# Altium PCB JacdacBrainESP32 48.PcbDoc (part 3 of 3)
Units mm, origin at the board's own origin, x right, y up, seen from the top; angles counter-clockwise.
Board outline 34 x 42.68 mm, 2 copper layers (Top Layer, Bottom Layer), stack 1.525 mm thick; 80 components, 57 nets, 295 pads, 72 vias.
Unrouted connection lines stored in the file: 49.
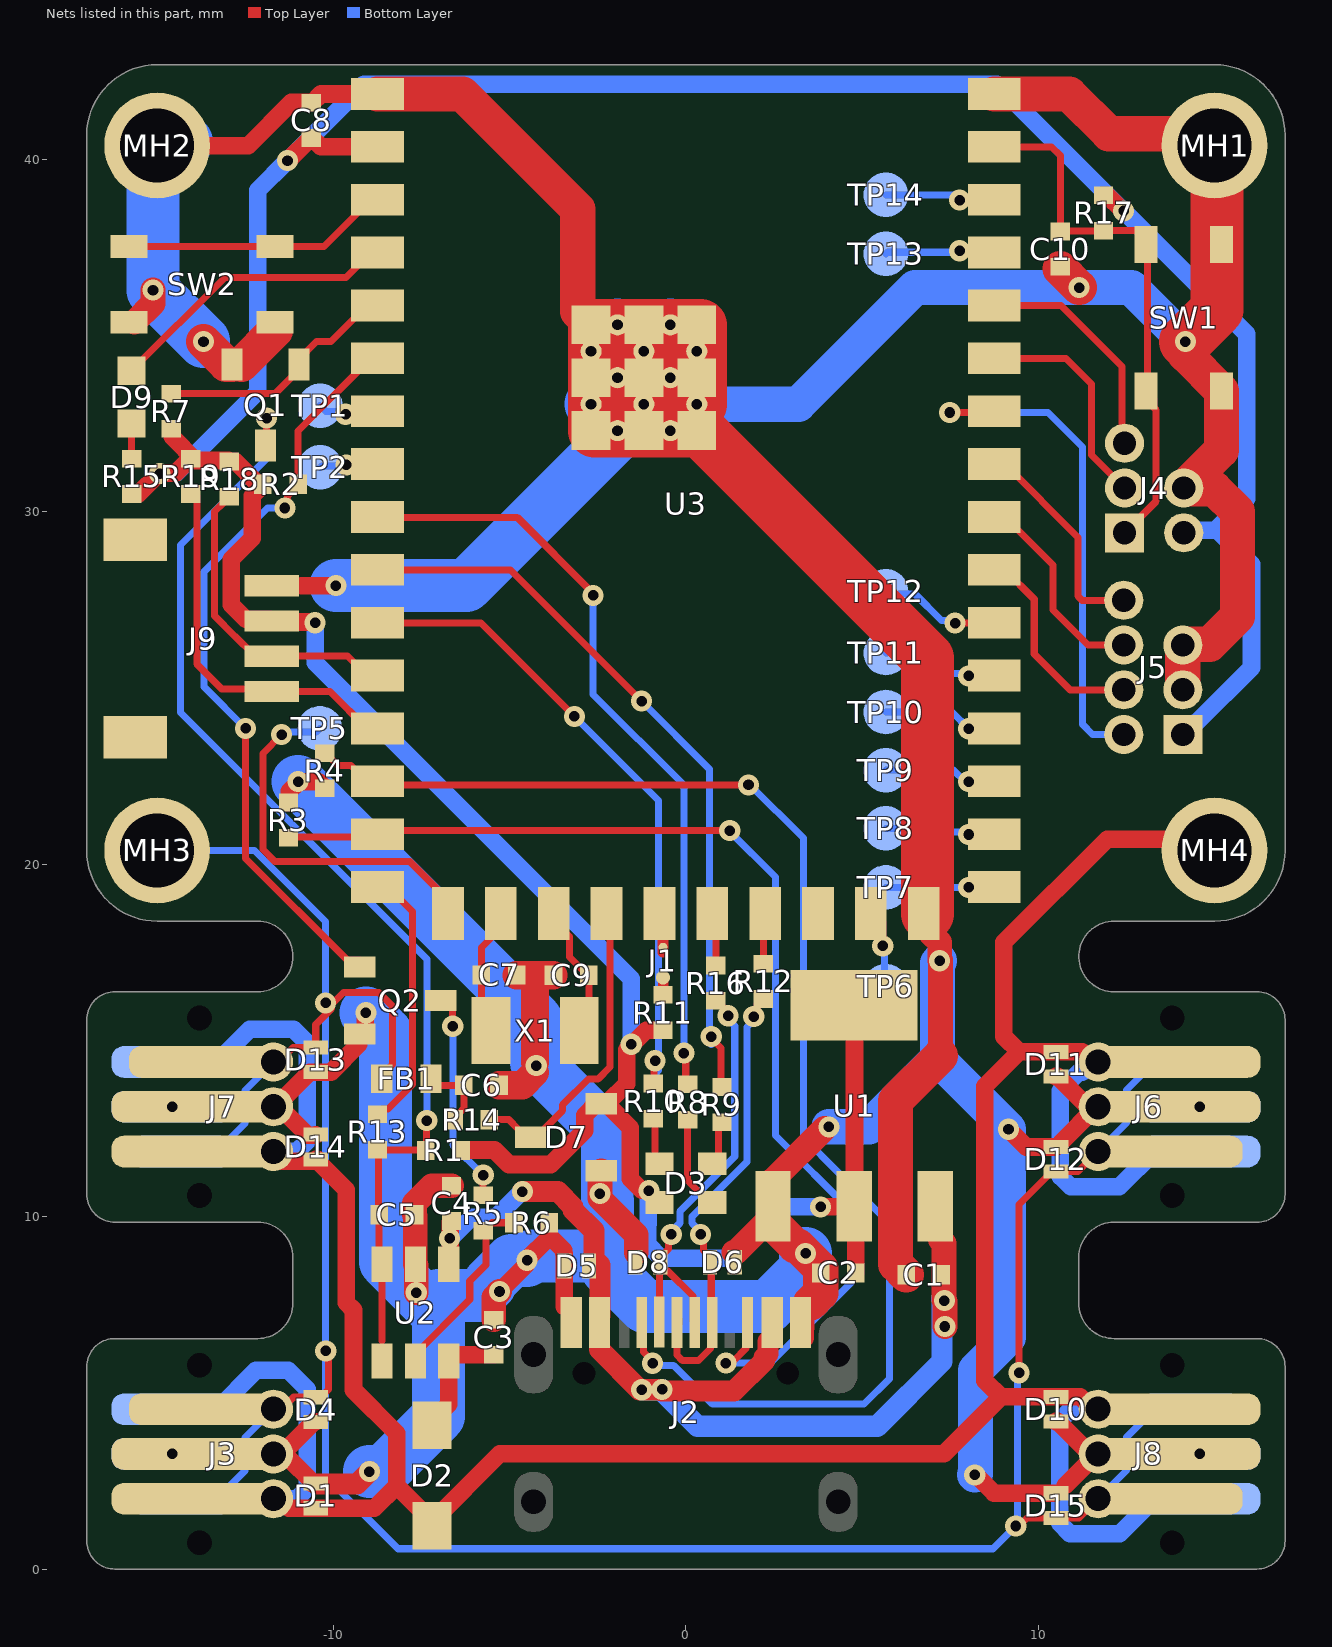
[diagram p2: the nets of this part, all layers, seen from the top]

## Via types
v1: diameter 0.6, hole 0.3, Top Layer to Bottom Layer, tented both sides, 72 vias

## Nets (pads, with @x,y where several pads share a name; then routed paths per layer and width w, separated by ;. In a path a pad name is that pad's centre, name@x,y a point inside that pad or via, vN(x,y) a via of type N, cw(c..) or ccw(c..) an arc to the next point about the centre after c; other vN are vias at no path point)
3V3: C2.2 C8.2 D3.1 D7.2 J4.2 J5.1 J9.2 R1.1 R2.1 R7.1 R11.1 R15.2 R17.1 R18.1 R19.1 U1.2 U3.2 | length 114.3
  Top Layer w0.3: R15.2@-15.725,30.5 R15.2@-15.7,30.5
  Top Layer w0.5: R15.2@-15.7,30.5 -15.533,30.5 -14.955,31.078 v1(-14.928,31.078) -14.909,31.097 -14.478,31.097 -14.075,31.5 R19.1@-14.025,31.5 ; R7.1@-14.6,32.35 -14.575,32.35 -14.575,32.125 R19.1@-13.9,31.45 ; R19.1@-13.875,31.45 R18.1@-12.975,31.45 ; R18.1@-12.943,31.425 -12.78,31.425 -12.155,30.8 -12,30.8 R2.1@-12,30.775 ; R2.1@-12,30.75 -12.3,30.45 -12.3,29.247 -12.9,28.647 -12.9,27.361 -12.489,26.95 -11.8,26.95 -11.719,26.869 -10.538,26.869 v1(-10.519,26.85) ; v1(-11.303,39.962) -11.288,39.962 -10.65,40.6 C8.2@-10.625,40.6 -10.6,40.6 -10.35,40.35 U3.2@-8.75,40.35 ; R1.1@-6.375,11.89 -5.43,11.89 -5.018,11.478 -3.837,11.478 -2.871,12.444 -2.871,12.879 -2.55,13.2 D7.2@-2.4,13.2 -2.35,13.25 -2.2,13.25 -1.678,13.772 -1.678,14.734 -1.55,14.862 v1(-1.55,14.89) -1.523,14.89 -1.123,15.29 R11.1@-0.674,15.29 ; D7.2@-2.25,13.2 -1.575,12.525 -1.575,11.07 -1.256,10.75 -1.069,10.75 v1(-1.05,10.731) ; v1(3.824,10.276) 4.535,10.276 4.561,10.302 4.561,10.326 U1.2@4.785,10.55 ; U1.2@4.785,16.25 U1.2@4.785,10.55 ; C2.2@4.825,8.4 4.825,8.858 4.82,8.863 4.82,10.515 U1.2@4.785,10.55 ; R17.1@11.825,38.975 R17.1@11.85,38.975 11.949,38.975 12.391,38.533 v1(12.418,38.533)
  Bottom Layer w0.5: v1(-14.928,31.078) -14.911,31.095 -14.46,31.095 -12.149,33.406 -12.149,39.116 v1(-11.303,39.962) ; v1@-11.296,39.962 -9.133,42.125 8.826,42.125 15.909,35.042 15.909,30.365 15.05,29.506 16.047,28.509 16.047,25.577 14.485,24.015 14.44,24.015 J5.1@14.1,23.675 ; v1(-10.519,26.85) -10.519,25.716 -1.55,16.747 v1(-1.55,14.89) ; v1@-1.069,10.704 -1.069,9.794 -1.089,9.775 -1.089,9.215 -0.693,8.82 1.215,8.82 2.671,10.276 v1(3.824,10.276) ; J4.2@14.125,29.4 14.193,29.468 15.088,29.468
\I\L\I\M\_\C\T\R\L\: Q2.1 R2.2 U3.6 | length 22
  Top Layer w0.2: v1(-12.489,23.85) -12.489,20.16 -9.607,17.278 -9.252,17.278 Q2.1@-9.077,17.103 ; v1(-11.375,30.104) -11.298,30.18 -11.298,30.452 -11,30.75 -11,32.289 -8.949,34.34 -8.649,34.34 U3.6@-8.554,34.246
  Bottom Layer w0.2: v1(-12.489,23.85) -13.666,25.026 -13.666,28.304 -11.866,30.104 v1(-11.375,30.104)
\I\L\I\M\_\E\N\A\B\L\E\: Q1.1 R7.2 U3.5 | length 7.2
  Top Layer w0.2: R7.2@-14.6,33.35 -11.65,33.35 -10.975,34.025 -10.975,34.325 -10.476,34.824 -10.067,34.824 -9.4,35.491 -9.4,35.5 -9.06,35.84 U3.5@-8.649,35.84
\I\L\I\M\_\F\A\U\L\T\: R13.1 U3.16 | length 7.4
  Top Layer w0.2: R13.1@-8.75,12.9 -8.6,13.05 -8.453,13.05 -7.752,13.751 -7.752,18.652 -8.44,19.34 U3.16@-8.649,19.34
CC1: J2.A5 R4.1 U3.14 | length 39.2
  Top Layer w0.2: R4.1@-10.125,23.05 -9.874,22.799 -9.499,22.799 -9.04,22.34 -8.649,22.34 -8.558,22.249 v1(1.777,22.249) ; J2.A5@-1.25,6.68 -1.2,6.63 -1.2,6.158 -0.944,5.902 v1(-0.944,5.841)
  Bottom Layer w0.2: v1(-0.944,5.841) -0.877,5.774 -0.344,5.774 0.75,4.68 5.059,4.68 5.778,5.399 5.778,9.802 4.339,11.241 3.335,12.246 3.335,20.738 1.823,22.249 v1(1.777,22.249)
CC2: J2.B5 R3.1 U3.15 | length 32.6
  Top Layer w0.2: R3.1@-11.175,20.775 -8.815,20.775 -8.75,20.84 -8.649,20.84 -8.536,20.952 v1(1.246,20.952) ; v1(1.136,5.842) 1.213,5.919 1.362,5.919 1.7,6.257 J2.B5@1.7,6.859
  Bottom Layer w0.2: v1(1.136,5.842) 2.399,5.842 4.705,8.148 4.705,10.138 2.541,12.302 2.541,19.635 1.246,20.929 v1(1.246,20.952)
ESP_EN: C10.2 J4.1 R17.2 SW1.3 SW1.4 U3.41 | length 15.9
  Top Layer w0.2: U3.41@8.75,40.35 10.376,40.35 10.625,40.101 C10.2@10.625,37.95 10.638,37.962 11.837,37.962 R17.2@11.85,37.975 12.825,37.975 13.05,37.75 SW1.3@13.05,37.575 ; J4.1@12.449,29.4 13.345,30.296 13.345,32.883 13.275,32.953 13.275,33.2 SW1.4@13.05,33.425 ; SW1.4@12.925,33.85 12.925,33.65 13.096,33.479 SW1.3@13.096,37.575
ESP_RXD: J4.5 U3.38 | length 6.6
  Top Layer w0.2: U3.38@8.75,35.85 10.642,35.85 12.375,34.117 12.375,32.014 J4.5@12.449,31.94
ESP_TCK: J5.4 U3.33 | length 6
  Top Layer w0.2: U3.33@8.75,28.35 9.05,28.35 9.885,27.515 9.885,25.965 10.905,24.945 J5.4@12.424,24.945
ESP_TDI: J5.8 U3.35 | length 6.3
  Top Layer w0.2: U3.35@8.75,31.35 9.05,31.35 11.129,29.271 11.129,27.601 11.246,27.484 J5.8@12.424,27.485
ESP_TDO: J5.6 U3.34 | length 5.9
  Top Layer w0.2: U3.34@8.75,29.85 9.05,29.85 10.414,28.486 10.414,27.215 11.414,26.215 J5.6@12.424,26.215
ESP_TMS: J5.2 U3.36 | length 14.7
  Top Layer w0.2: v1(7.489,32.814) 8.696,32.814 U3.36@8.786,32.905
  Bottom Layer w0.2: v1(7.489,32.814) 10.276,32.814 11.25,31.84 11.25,23.967 11.543,23.675 J5.2@12.424,23.675
ESP_TXD: J4.3 U3.37 | length 6.4
  Top Layer w0.2: U3.37@8.75,34.35 10.783,34.35 11.509,33.624 11.509,31.61 J4.3@12.449,30.67
GND: C1.1 C2.1 C3.1 C4.1 C5.1 C6.1 C7.1 C8.1 C9.1 C10.1 D1.2 D4.2 D5.2 D6.2 D7.1 D8.2 D10.2 D11.2 D12.2 D13.2 D14.2 D15.2 J2.A1 J2.A12 J2.B1 J2.B12 J3.2 J4.4 J5.3 J5.5 J6.2 J7.2 J8.2 J9.1 MH1.1 MH2.1 Q1.2 Q2.2 R3.2 R4.2 R6.1 SW1.1 SW1.2 SW2.1 SW2.2 U1.1 U2.2 U3.1 U3.26 U3.42 U3.43 | length 243.4
  Top Layer w0.5: MH2.1@-15,40.387 -12.413,40.387 -11.192,41.608 C8.1@-10.625,41.608 ; J7.2@-11.7,13.116 J7.2@-11.655,13.116 ; R3.2@-11.275,21.75 -11.25,21.75 -11.25,22.063 -11,22.313 v1(-11,22.34) -10.997,22.337 -10.412,22.337 R4.2@-10.238,22.163 ; -10.9,27.9 v1(-9.93,27.9) ; C8.1@-10.625,41.6 -10.6,41.6 -10.35,41.85 U3.1@-8.75,41.85 ; D1.2@-10.5,2.425 -10.509,2.416 -10.599,2.416 -10.599,2.474 -11.273,3.148 -11.583,3.148 J3.2@-11.7,3.265 -11.583,3.382 -11.343,3.382 -10.55,4.175 D4.2@-10.5,4.175 ; D14.2@-10.5,12.325 -10.519,12.306 -10.725,12.306 -11.535,13.116 J7.2@-11.655,13.116 ; Q2.2@-9.277,14.89 -10.067,14.1 D13.2@-10.5,14.1 -10.504,14.096 -10.674,14.096 J7.2@-11.655,13.116 ; Q2.2@-9.252,15.178 -9.146,15.178 -9.096,15.228 -9.096,15.764 v1(-9.077,15.783) ; C3.1@-5.45,7.075 C3.1@-5.425,7.075 ; v1@-5.274,7.908 -5.254,7.908 -4.525,8.637 -4.525,8.74 v1(-4.505,8.759) -4.505,8.786 -3.875,9.416 ; R6.1@-3.875,9.825 -3.875,9.456 -3.46,9.041 -3.46,8.958 -3.45,8.948 -3.45,8.604 -3.446,8.6 J2.A1@-3.446,7.448 ; J2.A12@3.3,6.737 3.383,6.82 J2.A12@3.383,6.555 ; J2.A12@3.4,6.837 J2.A12@3.4,7 ; v1(8.196,2.672) 8.223,2.672 8.745,2.15 D15.2@10.5,2.15 ; v1(9.154,12.479) 9.658,11.975 D12.2@10.5,11.975 ; D10.2@10.5,4.185 10.55,4.185 11.353,3.382 11.583,3.382 J8.2@11.7,3.265 11.655,3.265 10.77,2.38 ; D11.2@10.5,13.975 10.55,13.975 11.292,13.233 J6.2@11.583,13.233 ; D12.2@10.65,12.114 J6.2@11.652,13.116
  Top Layer w0.6: D1.2@-10.45,2.412 -9.332,2.412 v1(-8.98,2.764)
  Top Layer w0.7: SW2.2@-15.65,35.375 -15.119,35.906 v1(-15.119,36.287) ; C5.1@-7.7,10.05 -7.7,10.383 -7.208,10.875 C4.1@-6.649,10.875 ; U2.2@-7.675,8.65 C5.1@-7.676,10.026 ; v1@-7.646,7.847 U2.2@-7.646,8.621 ; C3.1@-5.45,7.075 -5.45,7.711 v1(-5.286,7.875) ; D7.1@-2.4,11.3 -2.438,11.262 v1(-2.438,10.652) -2.438,10.522 -1.403,9.487 D8.2@-1.403,8.979 ; D6.2@1.362,8.988 1.423,8.988 2.485,10.05 2.485,11.05 v1@3.935,12.5 ; U3.26@6.851,18.59 6.951,18.49 6.951,18.029 7.2,17.78 v1(7.2,17.257) ; 7.224,14.562 v1@7.224,17.282
  Top Layer w0.8: C6.1@-5.3,13.725 -4.637,13.725 v1@-4.277,14.085 ; C7.1@-4.8,16.854 -4.8,16.845 -4.277,16.845 ; v1@-4.277,14.372 -4.277,16.845 ; C9.1@-3.754,16.845 -4.277,16.845
  Top Layer w1: v1(-13.686,34.824) -13.036,34.175 Q1.2@-12.875,34.175 ; Q1.2@-12.609,34.175 SW2.1@-11.65,35.134 ; U3.1@-8.75,41.85 -6.338,41.85 -3.07,38.582 -3.07,35.68 -2.74,35.35 U3.43@-2.74,35.3 ; U3.43@-2.69,34.55 U3.43@-2.69,35.3 ; U1.1@2.475,10.05 2.475,9.8 3.107,9.168 ; v1@3.184,9.168 3.825,8.528 3.825,7.834 J2.A12@3.546,7.554 ; C1.1@6.25,8.35 5.95,8.65 5.95,13.287 7.224,14.562 ; U3.42@8.75,41.85 10.875,41.85 12,40.725 14.662,40.725 MH1.1@15,40.387 ; C10.1@10.625,36.892 v1(11.158,36.359) ; J5.3@14.1,24.945 J5.5@14.1,26.215 14.121,26.236 14.861,26.236 15.65,27.025 15.65,30 15.001,30.649 14.146,30.649 J4.4@14.125,30.67 15.2,31.745 SW1.2@15.2,33.425 14.171,34.454 v1(14.171,34.824)
  Top Layer w1.5: U3.43@-2.589,32.29 U3.43@-1.089,32.29 ; U3.43@-2.589,32.448 -2.589,35.29 U3.43@-1.089,35.29 ; U3.43@0.411,33.04 0.411,34.54 0.42,34.54 0.411,34.549 0.411,35.29 U3.43@-1.089,35.29 ; U3.26@6.851,18.59 6.851,25.85 0.411,32.29 U3.43@-1.089,32.29 ; v1(14.171,34.824) 15.075,35.728 15.075,38 15.075,40.312 MH1.1@15,40.387 ; U3.43@-1.089,32.29 U3.43@-1.089,35.29
  Bottom Layer w0.5: MH2.1@-14.17,40.487 MH2.1@-14.17,41.046 ; v1@-13.686,34.841 -13.686,35.3 ; -13.686,35.3 -13.66,35.3 -13.679,35.319 -14.072,35.319 -14.053,35.3 -13.686,35.3
  Bottom Layer w1: U3.43@-2.69,34.55 U3.43@-1.94,33.8 ; U3.43@0.31,33.05 3.193,33.05 6.502,36.359 12.637,36.359 v1(14.171,34.824) ; v1(4.06,12.546) 5.198,12.546 7.142,14.491 ; v1(7.2,17.257) 7.137,17.195 7.137,14.496 7.142,14.491 ; v1(8.196,2.672) 8.218,2.695 8.218,5.64 9.154,6.576 v1(9.154,12.479) 7.142,14.491 ; J4.4@14.125,30.67 J4.4@14.146,30.691
  Bottom Layer w1.5: MH2.1@-14.17,40.487 -14.323,40.487 -15.119,39.691 v1(-15.119,36.287) -15.119,36.274 -13.686,34.841 v1(-13.686,34.824) ; v1(-11,22.34) -4.245,15.585 -4.245,14.372 -2.23,12.358 v1@-2.23,10.44 ; v1(-9.93,27.9) -6.229,27.9 U3.43@-1.839,32.29 ; v1(-9.077,15.783) -8.525,15.231 -8.525,8.718 v1(-7.65,7.843) -7.014,7.208 -7.014,4.335 -8.585,2.764 v1(-8.98,2.764) ; -7.014,7.765 -5.871,7.765 -5.561,8.075 -5.561,8.141 -4.943,8.759 v1(-4.505,8.759) -4.382,8.883 -2.225,8.883 ; U3.43@-2.69,33.05 U3.43@-1.94,33.8 ; -2.225,10.44 -2.225,8.5 -1.178,7.453 2.346,7.453 3.396,8.503 v1(3.396,8.957) ; U3.43@-1.94,32.3 U3.43@-1.19,33.05 ; U3.43@-1.94,35.3 U3.43@-1.19,34.55 ; U3.43@-0.44,32.3 U3.43@0.31,33.05 ; U3.43@-0.44,33.8 U3.43@0.31,34.55 U3.43@-0.44,35.3
  other v1: -14.575,3.265 14.575,3.265 -14.575,13.116 14.575,13.116 -4.245,14.282
I2C_SCL: J9.4 R19.2 U3.13 | length 10.7
  Top Layer w0.2: R19.2@-13.875,30.45 -13.875,25.675 -13.175,24.975 J9.4@-11.75,24.975 ; J9.4@-11.75,24.9 -10.1,24.9 -9.04,23.84 U3.13@-8.649,23.84
I2C_SDA: J9.3 R18.2 U3.12 | length 8.9
  Top Layer w0.2: R18.2@-12.95,30.425 -12.975,30.425 -13.125,30.275 -13.125,30.25 -13.375,30 -13.375,27.046 -12.804,26.475 -12.8,26.475 -12.258,25.932 J9.3@-11.75,25.932 ; J9.3@-11.75,25.9 -9.6,25.9 -9.05,25.35 U3.12@-8.75,25.35
ILIM_STATUS: D9.1 U3.4 | length 8.5
  Top Layer w0.2: D9.1@-15.725,34 -13.08,36.645 -9.644,36.645 -8.949,37.34 U3.4@-8.649,37.34
IO4: TP1.1 U3.7 | length 0.8
  Bottom Layer w0.2: TP1.1@-10.374,33.007 -10.205,32.838 -9.728,32.838 v1(-9.651,32.762)
IO5: TP2.1 U3.8 | length 0.8
  Bottom Layer w0.2: TP2.1@-10.374,31.259 -10.34,31.293 -9.667,31.293 v1(-9.633,31.326)
IO14: TP5.1 U3.17 | length 10.9
  Top Layer w0.2: v1(-11.468,23.675) -12,23.143 -12,20.41 -11.665,20.075 -7.834,20.075 -6.649,18.89 U3.17@-6.649,18.59
  Bottom Layer w0.2: v1(-11.468,23.675) -11.391,23.752 -10.48,23.752 TP5.1@-10.381,23.85
IO26: TP6.1 U3.25 | length 2.2
  Top Layer w0.2: U3.25@5.351,18.59 5.586,18.355 v1(5.586,17.68)
  Bottom Layer w0.2: v1(5.586,17.68) 5.631,17.635 5.631,16.585 TP6.1@5.676,16.54
IO33: TP7.1 U3.27 | length 3.2
  Top Layer w0.2: v1(8.026,19.339) 8.85,19.339 U3.27@8.851,19.34
  Bottom Layer w0.2: TP7.1@5.676,19.34 v1@8.026,19.34
IO34: TP8.1 U3.28 | length 3.2
  Top Layer w0.2: v1(8.026,20.84) U3.28@8.851,20.84
  Bottom Layer w0.2: TP8.1@5.676,21.017 7.326,21.017 7.427,20.917 7.95,20.917 v1(8.026,20.84)
IO35: TP9.1 U3.29 | length 3.3
  Top Layer w0.2: v1(8.026,22.34) U3.29@8.851,22.34
  Bottom Layer w0.2: TP9.1@5.676,22.665 7.593,22.665 7.918,22.34 v1(8.026,22.34)
IO36: TP10.1 U3.30 | length 3.4
  Top Layer w0.2: v1(8.026,23.84) U3.30@8.851,23.84
  Bottom Layer w0.2: TP10.1@5.676,24.315 7.551,24.315 v1(8.026,23.84)
IO37: TP11.1 U3.31 | length 3.4
  Top Layer w0.2: v1(8.026,25.34) U3.31@8.851,25.34
  Bottom Layer w0.2: TP11.1@5.676,25.99 6.84,25.99 7.426,25.403 7.963,25.403 v1(8.026,25.34)
IO38: TP12.1 U3.32 | length 3.5
  Top Layer w0.2: v1(7.638,26.84) U3.32@8.851,26.84
  Bottom Layer w0.2: TP12.1@5.676,27.74 5.747,27.669 6.494,27.669 7.256,26.907 7.493,26.907 v1@7.56,26.84
IO45: TP13.1 U3.39 | length 3.2
  Top Layer w0.2: v1(7.766,37.404) 8.787,37.404 U3.39@8.851,37.34
  Bottom Layer w0.2: TP13.1@5.676,37.315 5.721,37.359 7.722,37.359 v1(7.766,37.404)
IO46: TP14.1 U3.40 | length 3.2
  Top Layer w0.2: v1@7.781,38.84 U3.40@8.851,38.84
  Bottom Layer w0.2: TP14.1@5.676,38.99 v1@7.843,38.99
  other v1: 7.766,38.84
JD_DATA: D4.1 D12.1 D13.1 D15.1 FB1.1 J3.1 J6.1 J7.1 J8.1 MH3.1 | length 83.4
  Top Layer w0.2: J3.1@-11.7,4.535 -11.468,4.535 -11.128,4.875 -10.35,4.875 D4.1@-10.25,4.975 ; J7.1@-11.7,14.386 -11.564,14.386 -11.15,14.8 D13.1@-10.5,14.8 -10.5,15.453 v1@-10.055,15.898 ; D4.1@-10.25,4.976 -10.134,5.092 -10.134,5.996 -10.217,6.08 v1(-10.217,6.188) ; v1@-10.023,16.045 -9.713,16.356 -8.713,16.356 -8.324,15.967 -8.324,14.312 -8.627,14.009 FB1.1@-8.627,13.909 ; v1(9.361,1.222) 9.449,1.222 9.678,1.45 11.15,1.45 11.695,1.995 J8.1@11.7,1.995 ; v1(9.456,5.57) 9.456,10.348 10.25,11.141 10.25,11.175 10.35,11.275 11.129,11.275 J6.1@11.7,11.846
  Bottom Layer w0.2: MH3.1@-15,20.387 -12.235,20.387 -10.219,18.371 -10.219,16.247 v1@-10.126,16.154 ; J3.1@-14.325,1.995 -13.3,1.995 -12.506,2.789 -12.506,3.729 J3.1@-11.7,4.535 ; J7.1@-14.325,11.846 -13.3,11.846 -12.506,12.64 -12.506,13.58 J7.1@-11.7,14.386 ; v1@-10.218,6.189 v1(-10.219,16.062) ; v1(-10.217,6.188) -10.219,6.186 -10.219,2.625 -8.17,0.576 8.715,0.576 v1(9.361,1.222) 9.408,1.269 9.408,5.522 v1(9.456,5.57) ; J8.1@11.7,1.995 12.506,2.801 12.506,3.741 13.3,4.535 J8.1@14.325,4.535 ; J6.1@11.7,11.846 12.506,12.652 12.506,13.592 13.3,14.386 J6.1@14.325,14.386
JD_DATA_MCU: D7.3 R14.1 U3.20 | length 8.9
  Top Layer w0.2: R14.1@-5.575,12.75 -5.025,12.75 -4.75,12.475 -4.75,12.45 -4.55,12.25 D7.3@-4.4,12.25 -4.25,12.25 -3.497,13.003 -3.497,13.172 -2.761,13.907 -2.486,13.907 -2.153,14.241 -2.153,18.586 U3.20@-2.149,18.59
JD_PWR: D1.1 D2.1 D10.1 D11.1 D14.1 J3.3 J6.3 J7.3 J8.3 MH4.1 | length 93.5
  Top Layer w0.5: J3.3@-11.7,1.995 -11.535,1.995 -11.265,1.725 D1.1@-10.5,1.725 -8.839,1.725 -8.207,2.357 ; J7.3@-11.7,11.846 J7.3@-11.583,11.729 ; J7.3@-11.489,11.575 -10.55,11.575 D14.1@-10.5,11.625 -10.45,11.625 -10.4,11.575 -10.4,11.525 -9.633,10.758 -9.633,7.554 -9.429,7.35 -9.429,5.079 -8.207,3.857 -8.207,2.357 ; D2.1@-7.2,1.225 D2.1@-7.2,1.35 ; J8.3@11.7,4.535 11.535,4.535 11.185,4.885 D10.1@10.5,4.885 8.94,4.885 ; J6.3@11.7,14.386 11.535,14.386 11.246,14.675 D11.1@10.5,14.675 9.456,14.675 ; MH4.1@14.171,20.387 13.848,20.71 11.952,20.71 9.022,17.78 9.022,15.11 9.456,14.675 ; -8.207,2.357 D2.1@-7.2,1.35 ; D2.1@-7.2,1.35 -5.283,3.267 7.323,3.267 8.94,4.885 ; 8.94,4.885 8.479,5.346 8.479,13.698 9.456,14.675
  Bottom Layer w0.5: J3.3@-14.575,4.535 -13.3,4.535 -12.195,5.64 -11.279,5.64 -10.745,5.106 -10.745,2.288 -11.038,1.995 J3.3@-11.7,1.995 ; J7.3@-14.575,14.386 -13.3,14.386 -12.375,15.311 -11.132,15.311 -10.745,14.924 -10.745,12.139 -11.038,11.846 J7.3@-11.7,11.846 ; J8.3@11.7,4.535 11.662,4.497 10.9,4.497 10.607,4.204 10.607,1.296 10.9,1.003 12.308,1.003 13.3,1.995 J8.3@14.575,1.995 ; J6.3@11.7,14.386 11.538,14.386 11.25,14.099 11.149,14.099 10.625,13.575 10.625,11.139 10.918,10.846 12.3,10.846 13.3,11.846 J6.3@14.575,11.846
JD_RGB_B: R8.2 U3.9 | length 22
  Top Layer w0.2: U3.9@-8.649,29.84 -4.785,29.84 -2.632,27.687 v1(-2.632,27.624) ; v1(-0.055,14.64) -0.002,14.588 -0.002,13.802 R8.2@0.05,13.75
  Bottom Layer w0.2: v1(-2.632,27.624) -2.632,24.818 -0.055,22.24 v1(-0.055,14.64)
JD_RGB_G: R9.2 U3.10 | length 21
  Top Layer w0.2: U3.10@-8.649,28.34 -4.973,28.34 v1(-1.257,24.623) ; v1(0.721,15.106) 0.721,15.056 0.998,14.779 0.998,13.727 R9.2@1.025,13.7
  Bottom Layer w0.2: v1(-1.257,24.623) 0.675,22.692 0.675,14.936 v1@0.721,14.89
JD_RGB_R: R10.2 U3.11 | length 18.4
  Top Layer w0.2: U3.11@-8.649,26.84 -5.809,26.84 v1(-3.16,24.192) ; R10.2@-0.925,13.775 -0.899,13.801 -0.899,14.395 v1(-0.872,14.421)
  Bottom Layer w0.2: v1(-3.16,24.192) -0.777,21.808 -0.777,14.142 -0.822,14.096
JD_STATUS: U3.24
MCU_BOOT: SW2.3 SW2.4 U3.3 | length 8
  Top Layer w0.2: SW2.4@-15.8,37.525 SW2.3@-11.65,37.525 -10.264,37.525 -8.949,38.84 U3.3@-8.649,38.84 ; U3.3@-8.649,38.85 U3.3@-8.324,38.85
NetC3_2: C3.2 D2.2 U2.6 | length 3.5
  Top Layer w0.5: D2.2@-7.334,3.941 -7.334,4.066 -6.725,4.675 U2.6@-6.725,5.9 ; U2.6@-6.725,6.025 -6.675,6.075 C3.2@-5.45,6.075
NetC5_2: C5.2 Q1.3 R1.2 R13.2 U2.3 U2.4 | length 32.3
  Top Layer w0.2: Q1.3@-11.925,31.875 -11.896,31.904 v1(-11.896,32.656) ; -8.625,6.475 U2.3@-8.625,8.65 -8.7,8.725 C5.2@-8.7,10.05 -8.725,10.075 -8.725,11.875 -8.712,11.888 -7.388,11.888 R1.2@-7.375,11.875 -7.362,11.888 -7.362,12.712 v1(-7.35,12.724)
  Bottom Layer w0.2: v1(-11.896,32.656) -11.896,31.501 -14.338,29.059 -14.338,24.299 -7.35,17.311 v1(-7.35,12.724)
NetC6_2: C6.2 FB1.2 R14.2 | length 2.2
  Top Layer w0.2: FB1.2@-7.227,13.909 -7.044,13.725 C6.2@-6.3,13.725 ; R14.2@-6.575,12.75 -6.425,12.9 -6.425,12.941 -6.3,13.067 C6.2@-6.3,13.815
NetC7_2: C7.2 U3.18 X1.1 | length 3.9
  Top Layer w0.2: X1.1@-5.598,15.879 X1.1@-5.448,15.729 ; X1.1@-5.435,15.312 -5.8,15.676 -5.8,17.639 -5.149,18.29 U3.18@-5.149,18.59
NetC9_2: C9.2 U3.19 X1.2 | length 3.9
  Top Layer w0.2: U3.19@-3.649,18.59 -3.649,18.29 -3.299,17.94 -3.299,17.362 -2.956,17.02 -2.904,17.02 -2.754,16.87 -2.754,15.493 X1.2@-2.935,15.312 ; X1.2@-3.05,15.831 X1.2@-2.948,15.729
NetD3_2: D3.2 R10.1 | length 1.3
  Top Layer w0.2: R10.1@-0.875,12.775 -0.875,11.625 D3.2@-0.75,11.5
NetD3_3: D3.3 R9.1 | length 1.3
  Top Layer w0.2: D3.3@0.75,11.5 0.925,11.675 0.925,12.575 R9.1@1.025,12.675
NetD3_4: D3.4 R8.1 | length 2.7
  Top Layer w0.2: R8.1@0.05,12.75 0.05,11.025 0.675,10.4 D3.4@0.75,10.4
NetD9_2: D9.2 R15.1 | length 1
  Top Layer w0.2: R15.1@-15.725,31.575 D9.2@-15.725,32.525
NetJ1_1: J1.1 R11.2 | length 0.5
  Top Layer w0.3: J1.1@-0.649,16.785 -0.644,16.78 -0.644,16.295 R11.2@-0.639,16.29
NetJ9_M1: J9.M1
NetJ9_M2: J9.M2
NetQ2_3: Q2.3 R5.1 | length 6
  Top Layer w0.2: Q2.3@-6.777,16.153 -6.617,15.993 -6.617,15.406 v1(-6.612,15.4) ; R5.1@-5.75,10.6 v1(-5.75,11.176)
  Bottom Layer w0.2: v1(-6.612,15.4) -6.612,12.038 v1(-5.75,11.176)
NetR5_2: R5.2 R6.2 U2.5 | length 5.7
  Top Layer w0.2: U2.5@-7.675,5.9 -7.675,6.1 -6.131,7.644 -6.131,8.177 -5.675,8.633 R5.2@-5.675,9.6 ; R5.2@-5.75,9.6 -5.725,9.6 -5.5,9.825 R6.2@-4.875,9.825 R6.2@-5.013,9.687
RXD1: J1.2 U3.21 | length 1.1
  Top Layer w0.3: -0.649,17.5 J1.2@-0.649,17.725 U3.21@-0.649,18.59
USB_N: D8.1 J2.A7 J2.B7 R16.1 | length 11.4
  Top Layer w0.2: D8.1@-0.751,8.491 -0.751,7.707 J2.B7@-0.75,7.706 ; D8.1@-0.666,8.491 -0.625,8.45 -0.507,8.45 0.2,7.743 0.2,7.05 J2.A7@0.25,7 ; D8.1@-0.666,8.55 -0.666,8.641 D8.1@-0.725,8.7 -0.725,8.85 -0.49,9.085 -0.49,9.418 v1(-0.414,9.495) ; R16.1@0.85,16.125 0.875,16.125 1.2,15.8 v1(1.2,15.7)
  Bottom Layer w0.2: v1(-0.414,9.495) -0.414,9.57 -0.172,9.812 -0.172,10.141 1.388,11.7 1.388,15.404 1.2,15.592 v1(1.2,15.7)
USB_P: D6.1 J2.A6 J2.B6 R12.1 | length 12.9
  Top Layer w0.2: J2.A6@-0.25,7 -0.25,6.068 -0.1,5.919 0.362,5.919 0.7,6.257 0.7,6.95 J2.B6@0.75,7 0.721,7.029 0.721,8.32 0.716,8.325 ; J2.A6@-0.25,7.125 -0.2,7.075 J2.A6@-0.2,6.957 ; v1(0.42,9.495) 0.497,9.418 0.497,9.041 0.687,8.85 D6.1@0.687,8.7 ; v1(1.925,15.675) 1.925,15.783 2.025,15.883 2.025,16.025 2.175,16.175 R12.1@2.2,16.175
  Bottom Layer w0.2: v1(0.42,9.495) 0.42,9.57 0.178,9.812 0.178,9.996 1.738,11.555 1.738,15.379 1.925,15.567 v1(1.925,15.675)
USB_R_N: R16.2 U3.22 | length 1.5
  Top Layer w0.2: U3.22@0.75,18.6 0.85,18.5 R16.2@0.85,17.125
USB_R_P: R12.2 U3.23 | length 1.4
  Top Layer w0.2: R12.2@2.2,17.175 2.2,18.55 U3.23@2.25,18.6
VUSB: C1.2 C4.2 D5.1 J2.A4 J2.A9 J2.B4 J2.B9 U1.3 U2.1 | length 30.4
  Top Layer w0.5: U2.1@-6.725,8.65 -6.685,8.69 -6.685,9.839 -6.674,9.85 -6.674,9.875 C4.2@-6.649,9.875
  Top Layer w0.6: v1(-4.637,10.708) -3.632,10.708 -3.2,10.276 -3.2,10.188 -2.61,9.598 -2.61,8.791 -2.438,8.619 J2.B9@-2.438,7.176 ; J2.B9@-2.45,6.575 -2.45,6.224 -1.312,5.086 -0.709,5.086 -0.673,5.05 1.369,5.05 2.225,5.906 2.225,5.999 2.333,6.107 J2.B4@2.333,6.458
  Top Layer w0.7: U1.3@7.075,10.3 7.225,10.15 7.225,9.339 7.324,9.24 v1@7.324,7.626 ; v1(7.351,6.881) v1@7.351,7.599
  Bottom Layer w0.5: v1(-6.701,9.382) -6.674,9.382 -6.074,9.981 -5.391,9.981 -4.664,10.708 v1(-4.637,10.708)
  Bottom Layer w0.6: v1(-1.252,5.086) -0.682,5.086 v1(-0.673,5.096) ; v1@-0.696,5.073 0.327,4.05 5.432,4.05 7.271,5.889 7.271,7.644 v1@7.256,7.659
  other v1: 7.336,7.614
pads on no net: J2.1 J2.2 J2.3 J2.4 J2.A8 J2.B8 J3. J6. J7. J8.

## Silkscreen, mask and mechanical layers (free items; w line width, h text height)
Top Overlay:
  region: 187 vertices and 1 holes, not listed, extent 12.256,38.252 13.955,41.525
  text "BOOT" at -9.8,34.825 h0.95 r90
  text "RST" at 12,33.298 h1 r90
  text "UART" at 11.4,28.675 h1 r90
  text "JTAG" at 11.275,23.4 h1 r90
Bottom Overlay:
  drawing of 149 lines, arcs and shapes, not listed
  text "IO46" at 9.448,38.521 h1
  text "IO45" at 9.448,36.767 h1
  text "IO4" at -11.914,32.328 h1
  text "RXD" at 11.807,31.4 h0.7
  text "IO5" at -11.914,30.545 h1
  text "GND" at 16.775,30.175 h0.7
  text "TXD" at 11.892,30.104 h0.7
  text "JacdacBrainESP32" at 5.425,29.825 h1
  text "3V3" at 16.7,28.925 h0.7
  text "EN" at 11.7,28.896 h0.7
  text "'.ProjectCodenameID'-'.ProjectRevision'" at 3.275,28.5 h1
  text "IO38" at 9.448,27.157 h1
  text "TDI" at 11.892,27.048 h0.7
  text "TDO" at 11.892,25.8 h0.7
  text "GND" at 16.775,25.8 h0.7
  text "IO37" at 9.448,25.526 h1
  text "TCK" at 11.892,24.623 h0.7
  text "GND" at 16.775,24.55 h0.7
  text "IO36" at 9.448,23.773 h1
  text "TMS" at 11.892,23.227 h0.7
  text "3V3" at 16.675,23.2 h0.7
  text "IO14" at -11.914,23.174 h1
  text "IO35" at 9.448,22.063 h1
  text "IO34" at 9.448,20.459 h1
  text "IO33" at 9.448,18.823 h1
  text "IO26" at 9.448,16.059 h1
Dimension:
  lines w0.05: -16.999,40.681 -16.998,22.052 ; -16.999,40.682 cw(c-14.998,40.681) -14.999,42.682 ; -14.998,42.681 15,42.681 ; 14.999,42.682 cw(c14.999,40.681) 17,40.682 ; 17,40.681 17,20.381 cw(c14.997,20.383) 15,18.381 12.15,18.381 ccw(c12.149,17.381) 12.148,16.38 16.198,16.38 cw(c16.199,15.579) 17,15.58 17,10.64 cw(c16.199,10.641) 16.198,9.84 12.148,9.84 ccw(c12.149,8.84) 11.148,8.84 11.148,7.541 ccw(c12.149,7.54) 12.148,6.54 16.198,6.54 cw(c16.199,5.739) 17,5.74 17,0.8 cw(c16.199,0.801) 16.198,0 -16.198,0 cw(c-16.201,0.799) -17,0.8 -17,5.74 cw(c-16.201,5.741) -16.199,6.54 -12.148,6.54 ccw(c-12.149,7.54) -11.148,7.541 -11.148,8.84 ccw(c-12.149,8.84) -12.149,9.84 -16.198,9.84 cw(c-16.201,10.639) -17,10.64 -17,15.58 cw(c-16.201,15.581) -16.198,16.38 -12.148,16.38 ccw(c-12.15,17.38) -12.148,18.381 -14.998,18.381 cw(c-14.998,20.38) -16.997,20.381 -16.998,22.052 ; -16.998,22.052 -16.998,22.052
Board Outline:
  lines w0.1: -16.999,40.681 -16.998,22.052 ; -16.999,40.682 cw(c-14.998,40.681) -14.999,42.682 ; -14.998,42.681 15,42.681 ; 14.999,42.682 cw(c14.999,40.681) 17,40.682 ; 17,40.681 17,20.381 cw(c14.997,20.383) 15,18.381 12.15,18.381 ccw(c12.149,17.381) 12.148,16.38 16.198,16.38 cw(c16.199,15.579) 17,15.58 17,10.64 cw(c16.199,10.641) 16.198,9.84 12.148,9.84 ccw(c12.149,8.84) 11.148,8.84 11.148,7.541 ccw(c12.149,7.54) 12.148,6.54 16.198,6.54 cw(c16.199,5.739) 17,5.74 17,0.8 cw(c16.199,0.801) 16.198,0 -16.198,0 cw(c-16.201,0.799) -17,0.8 -17,5.74 cw(c-16.201,5.741) -16.199,6.54 -12.148,6.54 ccw(c-12.149,7.54) -11.148,7.541 -11.148,8.84 ccw(c-12.149,8.84) -12.149,9.84 -16.198,9.84 cw(c-16.201,10.639) -17,10.64 -17,15.58 cw(c-16.201,15.581) -16.198,16.38 -12.148,16.38 ccw(c-12.15,17.38) -12.148,18.381 -14.998,18.381 cw(c-14.998,20.38) -16.997,20.381 -16.998,22.052 ; -16.998,22.052 -16.998,22.052
Top Assy:
  lines w0.05: -16.999,40.681 -16.998,22.052 ; -16.999,40.682 cw(c-14.998,40.681) -14.999,42.682 ; -14.998,42.681 15,42.681 ; 14.999,42.682 cw(c14.999,40.681) 17,40.682 ; 17,40.681 17,20.381 cw(c14.997,20.383) 15,18.381 12.15,18.381 ccw(c12.149,17.381) 12.148,16.38 16.198,16.38 cw(c16.199,15.579) 17,15.58 17,10.64 cw(c16.199,10.641) 16.198,9.84 12.148,9.84 ccw(c12.149,8.84) 11.148,8.84 11.148,7.541 ccw(c12.149,7.54) 12.148,6.54 16.198,6.54 cw(c16.199,5.739) 17,5.74 17,0.8 cw(c16.199,0.801) 16.198,0 -16.198,0 cw(c-16.201,0.799) -17,0.8 -17,5.74 cw(c-16.201,5.741) -16.199,6.54 -12.148,6.54 ccw(c-12.149,7.54) -11.148,7.541 -11.148,8.84 ccw(c-12.149,8.84) -12.149,9.84 -16.198,9.84 cw(c-16.201,10.639) -17,10.64 -17,15.58 cw(c-16.201,15.581) -16.198,16.38 -12.148,16.38 ccw(c-12.15,17.38) -12.148,18.381 -14.998,18.381 cw(c-14.998,20.38) -16.997,20.381 -16.998,22.052 ; -16.998,22.052 -16.998,22.052
Bottom Assy:
  lines w0.05: -16.999,40.681 -16.998,22.052 ; -16.999,40.682 cw(c-14.998,40.681) -14.999,42.682 ; -14.998,42.681 15,42.681 ; 14.999,42.682 cw(c14.999,40.681) 17,40.682 ; 17,40.681 17,20.381 cw(c14.997,20.383) 15,18.381 12.15,18.381 ccw(c12.149,17.381) 12.148,16.38 16.198,16.38 cw(c16.199,15.579) 17,15.58 17,10.64 cw(c16.199,10.641) 16.198,9.84 12.148,9.84 ccw(c12.149,8.84) 11.148,8.84 11.148,7.541 ccw(c12.149,7.54) 12.148,6.54 16.198,6.54 cw(c16.199,5.739) 17,5.74 17,0.8 cw(c16.199,0.801) 16.198,0 -16.198,0 cw(c-16.201,0.799) -17,0.8 -17,5.74 cw(c-16.201,5.741) -16.199,6.54 -12.148,6.54 ccw(c-12.149,7.54) -11.148,7.541 -11.148,8.84 ccw(c-12.149,8.84) -12.149,9.84 -16.198,9.84 cw(c-16.201,10.639) -17,10.64 -17,15.58 cw(c-16.201,15.581) -16.198,16.38 -12.148,16.38 ccw(c-12.15,17.38) -12.148,18.381 -14.998,18.381 cw(c-14.998,20.38) -16.997,20.381 -16.998,22.052 ; -16.998,22.052 -16.998,22.052

## Dimensions
-16.198,0 to -14.998,42.681 on Dimension
-16.998,22.052 to 17,20.381 on Dimension

## Text inside footprints (layer, text, board x,y; h text height)
J3: Mechanical 9 "Jacdac / cable connector  / body" at -21.158,-1.556 h1.7 r90; Alignment "board outline  / for 'innie'" at -9.169,7.795 h1.2 r90; Alignment "board outline  / for 'outie'" at -12.014,8.405 h1.2 r90
J6: Mechanical 9 "Jacdac / cable connector  / body" at 21.158,17.937 h1.7 r270; Alignment "board outline  / for 'innie'" at 9.169,8.586 h1.2 r270; Alignment "board outline  / for 'outie'" at 12.014,7.976 h1.2 r270
J7: Mechanical 9 "Jacdac / cable connector  / body" at -21.158,8.295 h1.7 r90; Alignment "board outline  / for 'innie'" at -9.169,17.646 h1.2 r90; Alignment "board outline  / for 'outie'" at -12.014,18.256 h1.2 r90
J8: Mechanical 9 "Jacdac / cable connector  / body" at 21.158,8.086 h1.7 r270; Alignment "board outline  / for 'innie'" at 9.169,-1.265 h1.2 r270; Alignment "board outline  / for 'outie'" at 12.014,-1.875 h1.2 r270
MH1: Assembly Notes "board outline can  / be on 2.0mm   / radius if necessary" at 17.78,36.931 h0.5; Assembly Notes "5mm dia keepout  / for traces and  / components to  / allow space for  / bushes/standoffs/ / nuts/screw heads" at 18.275,42.012 h0.5
U3: Alignment "board outline" at 10.025,41.85 h1; Top Body "ANTENNA" at -4.455,46.021 h1.27